# EAGLE board VST2560Board (EAGLE 8.5.2)
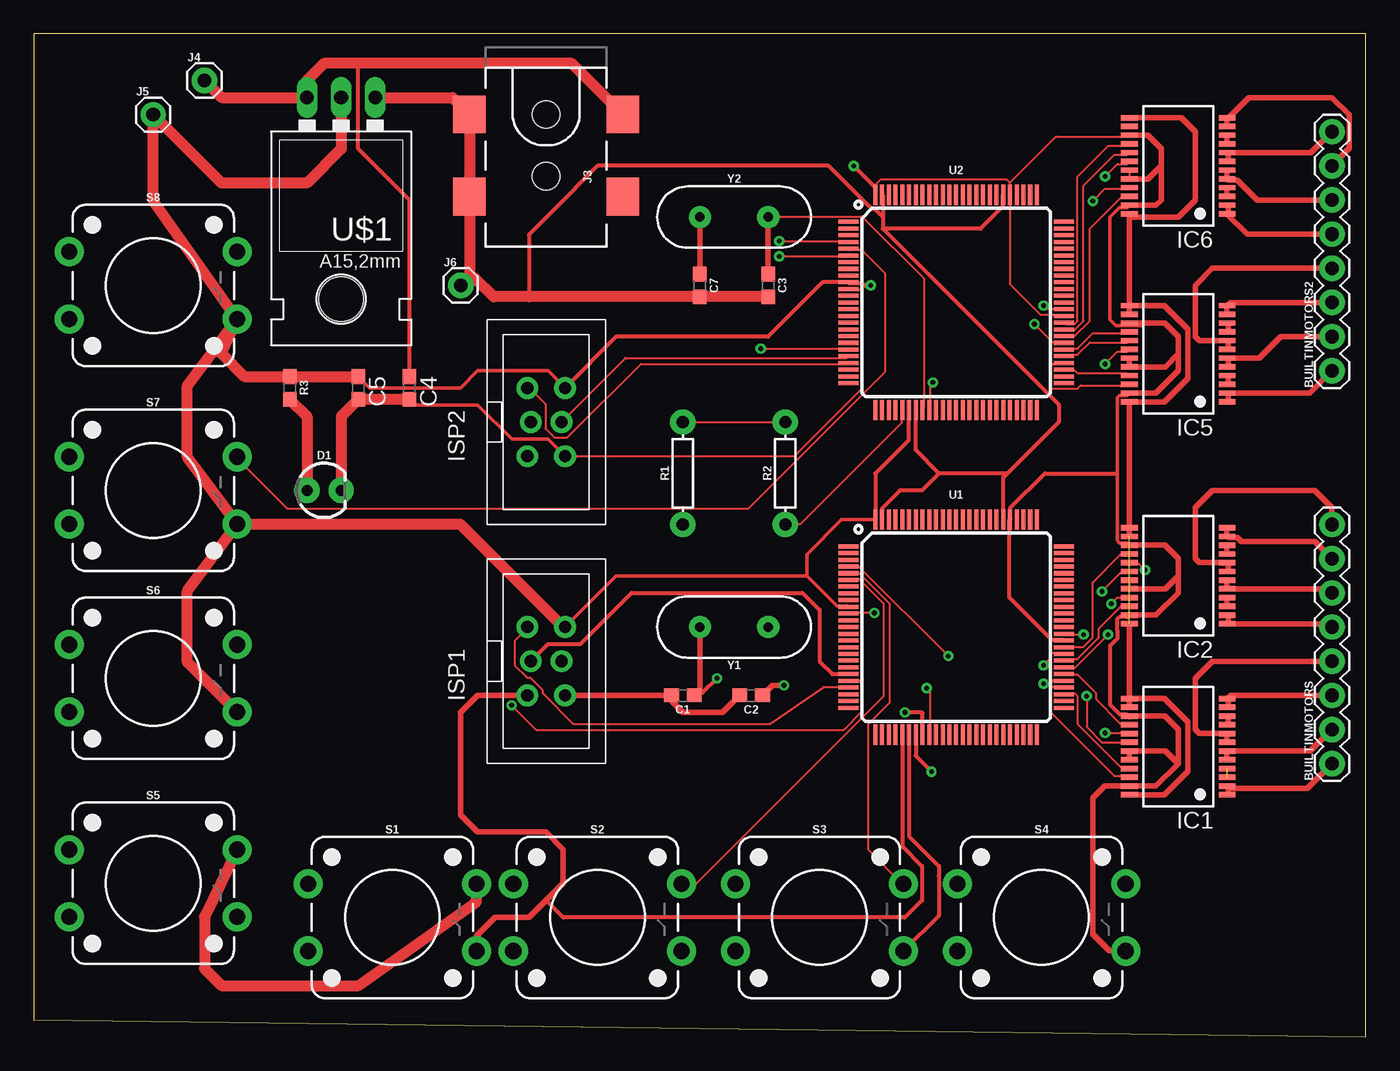
[diagram p0: board, top side]
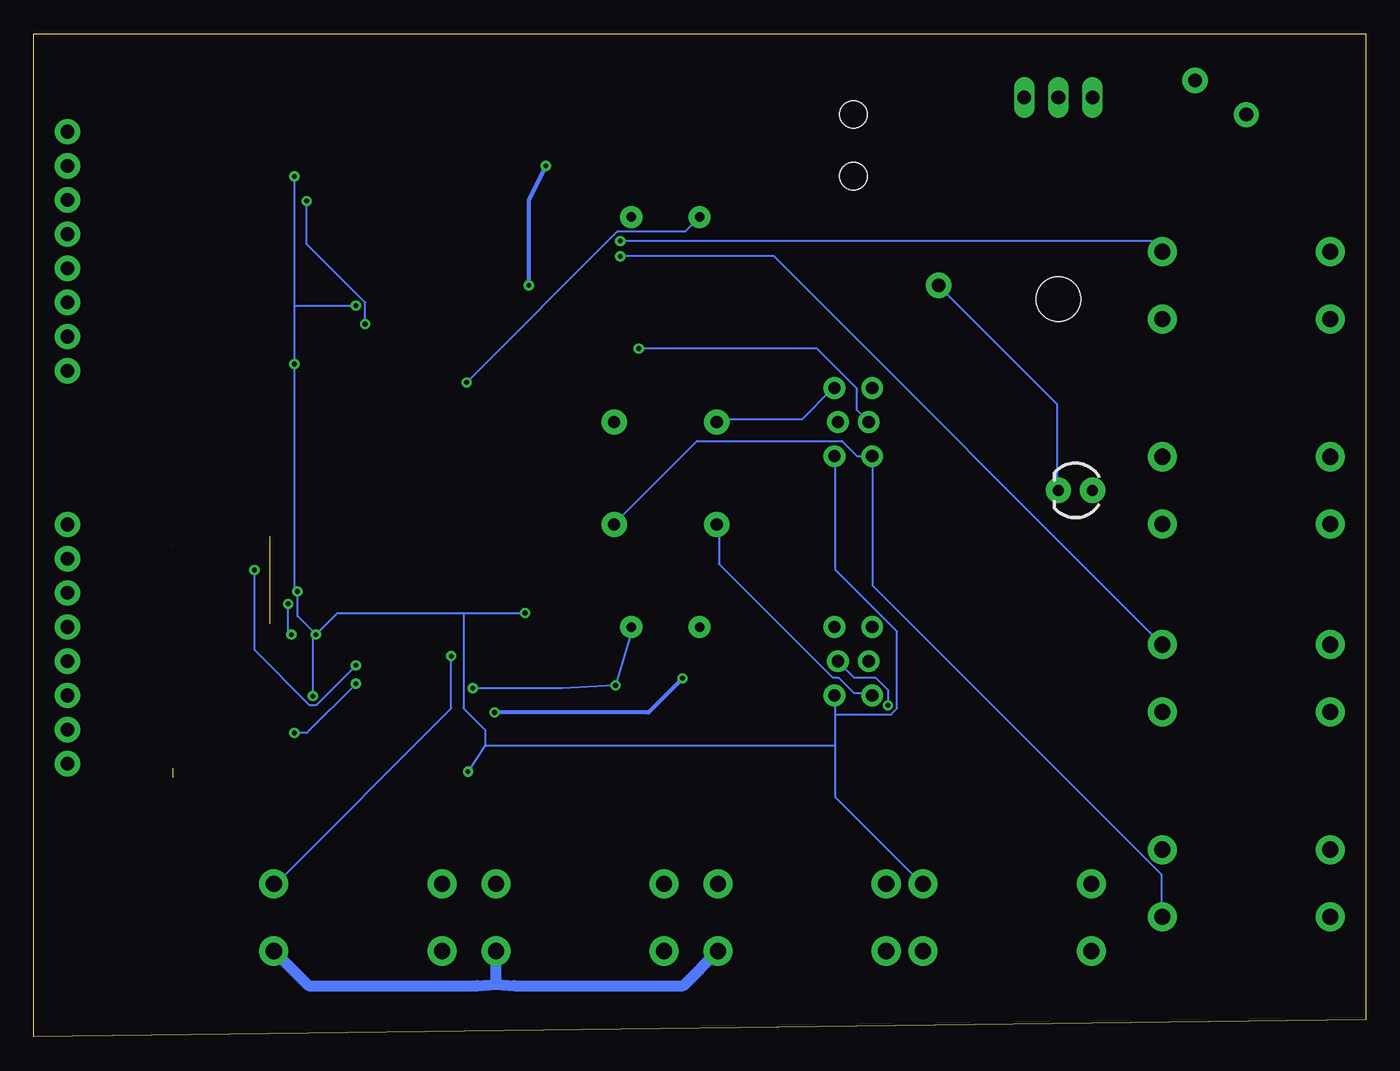
[diagram p1: board, bottom side, seen from below]

Size 99.04 x 74.6 mm. Coordinates in mm from the lower left corner, seen from the top.
Outline: 0,1.27 99.04,0 99.04,74.6 0,74.6 0,1.27
Copper layers (1*16): Top 0.035mm / dielectric 1.5mm / Bottom 0.035mm
Design rules "default": minimum track width 6mil, minimum drill 0.35mm, track to track 6mil, track to pad 6mil, pad to pad 6mil, via to via 6mil, smd to smd 6mil, copper to edge 40mil, drill to drill 6mil, minimum pad ring 10mil, minimum via ring 8mil, stop-mask expansion 4mil, vias tented up to drill 0mil, thermal gap 10mil

## Footprints (pad centres in the part's own frame; a part is rotated, then mirrored left to right if it is on the bottom)
1X08 = drill 1.016 pad 1.88: 1 0,0; 2 2.54,0; 3 5.08,0; 4 7.62,0; 5 10.16,0; 6 12.7,0; 7 15.24,0; 8 17.78,0
0603 = smd 1.1 x 1: 1 -0.85,0; 2 0.85,0
C0603 = smd 1.1 x 1: 1 -0.85,0; 2 0.85,0
LED_3MM = drill 0.813 pad 1.88: A -1.27,0; K 1.27,0
SSOP24 = smd 0.4 x 1.25: 1 -3.575,-3.625; 2 -2.925,-3.625; 3 -2.275,-3.625; 4 -1.625,-3.625; 5 -0.975,-3.625; 6 -0.325,-3.625; 7 0.325,-3.625; 8 0.975,-3.625; 9 1.625,-3.625; 10 2.275,-3.625; 11 2.925,-3.625; 12 3.575,-3.625; 13 3.575,3.625; 14 2.925,3.625; 15 2.275,3.625; 16 1.625,3.625; 17 0.975,3.625; 18 0.325,3.625; 19 -0.325,3.625; 20 -0.975,3.625; 21 -1.625,3.625; 22 -2.275,3.625; 23 -2.925,3.625; 24 -3.575,3.625
AVRISP-BOX = drill 0.9 pad 1.626: 1 -1.397,2.54; 2 1.397,2.54; 3 -1.143,0; 4 1.143,0; 5 -1.397,-2.54; 6 1.397,-2.54
POWER_JACK_SMD = smd 2.8 x 2.4: GND 0,-5.7; P$4 6.1,-5.7; VIN0 0,5.7; VIN1 6.1,5.7 | hole 2.032: 0,0; 4.572,0
1X01 = drill 1.016 pad 1.88: 1 0,0
AXIAL-0.3 = drill 0.9 pad 1.88: P$1 -3.81,0; P$2 3.81,0
TACTILE_SWITCH_PTH_12MM = drill 1.2 pad 2.159: 1 6.25,-2.5; 2 -6.25,-2.5; 3 6.25,2.5; 4 -6.25,2.5
TQFP100 = smd 1.5 x 0.3: 1 -8,6; 2 -8,5.5; 3 -8,5; 4 -8,4.5; 5 -8,4; 6 -8,3.5; 7 -8,3; 8 -8,2.5; 9 -8,2; 10 -8,1.5; 11 -8,1; 12 -8,0.5; 13 -8,0; 14 -8,-0.5; 15 -8,-1; 16 -8,-1.5; 17 -8,-2; 18 -8,-2.5; 19 -8,-3; 20 -8,-3.5; 21 -8,-4; 22 -8,-4.5; 23 -8,-5; 24 -8,-5.5; 25 -8,-6; 51 8,-6; 52 8,-5.5; 53 8,-5; 54 8,-4.5; 55 8,-4; 56 8,-3.5; 57 8,-3; 58 8,-2.5; 59 8,-2; 60 8,-1.5; 61 8,-1; 62 8,-0.5; 63 8,0; 64 8,0.5; 65 8,1; 66 8,1.5; 67 8,2; 68 8,2.5; 69 8,3; 70 8,3.5; 71 8,4; 72 8,4.5; 73 8,5; 74 8,5.5; 75 8,6 | smd 0.3 x 1.5: 26 -6,-8; 27 -5.5,-8; 28 -5,-8; 29 -4.5,-8; 30 -4,-8; 31 -3.5,-8; 32 -3,-8; 33 -2.5,-8; 34 -2,-8; 35 -1.5,-8; 36 -1,-8; 37 -0.5,-8; 38 0,-8; 39 0.5,-8; 40 1,-8; 41 1.5,-8; 42 2,-8; 43 2.5,-8; 44 3,-8; 45 3.5,-8; 46 4,-8; 47 4.5,-8; 48 5,-8; 49 5.5,-8; 50 6,-8; 76 6,8; 77 5.5,8; 78 5,8; 79 4.5,8; 80 4,8; 81 3.5,8; 82 3,8; 83 2.5,8; 84 2,8; 85 1.5,8; 86 1,8; 87 0.5,8; 88 0,8; 89 -0.5,8; 90 -1,8; 91 -1.5,8; 92 -2,8; 93 -2.5,8; 94 -3,8; 95 -3.5,8; 96 -4,8; 97 -4.5,8; 98 -5,8; 99 -5.5,8; 100 -6,8
78XXL = drill 1.016 long: GND 0,-3.81; IN -2.54,-3.81; OUT 2.54,-3.81 | hole 3.302: 0,11.176
HC49US = drill 0.7 pad 1.651: 1 -2.54,0; 2 2.54,0

## Placement (x,y rotation side)
BUILTINMOTORS  [1X08]  96.52,20.32 90 top
BUILTINMOTORS2  [1X08]  96.52,49.53 90 top
C1  22pF  [0603]  48.26,25.4 180 top
C2  22pF  [0603]  53.34,25.4 180 top
C3  22pF  [0603]  54.61,55.88 270 top
C4  [C0603]  27.94,48.26 270 top
C5  [C0603]  24.13,48.26 270 top
C7  22pF  [0603]  49.53,55.88 270 top
D1  [LED_3MM]  21.59,40.64 0 top
IC1  TB6612FNG  [SSOP24]  85.09,21.59 90 top
IC2  TB6612FNG  [SSOP24]  85.09,34.29 90 top
IC5  TB6612FNG  [SSOP24]  85.09,50.8 90 top
IC6  TB6612FNG  [SSOP24]  85.09,64.77 90 top
ISP1  AVRISP-BOX  [AVRISP-BOX]  38.1,27.94 0 top
ISP2  AVRISP-BOX  [AVRISP-BOX]  38.1,45.72 0 top
J3  5.5x2.1mm Barrel  [POWER_JACK_SMD]  38.1,68.58 270 top
J4  [1X01]  12.7,71.12 0 top
J5  [1X01]  8.89,68.58 0 top
J6  [1X01]  31.75,55.88 0 top
R1  10k  [AXIAL-0.3]  48.26,41.91 90 top
R2  10k  [AXIAL-0.3]  55.88,41.91 90 top
R3  1k  [0603]  19.05,48.26 270 top
S1  MOMENTARY-SWITCH-SPST-PTH-12MM  [TACTILE_SWITCH_PTH_12MM]  26.67,8.89 0 top
S2  MOMENTARY-SWITCH-SPST-PTH-12MM  [TACTILE_SWITCH_PTH_12MM]  41.91,8.89 0 top
S3  MOMENTARY-SWITCH-SPST-PTH-12MM  [TACTILE_SWITCH_PTH_12MM]  58.42,8.89 0 top
S4  MOMENTARY-SWITCH-SPST-PTH-12MM  [TACTILE_SWITCH_PTH_12MM]  74.93,8.89 0 top
S5  MOMENTARY-SWITCH-SPST-PTH-12MM  [TACTILE_SWITCH_PTH_12MM]  8.89,11.43 0 top
S6  MOMENTARY-SWITCH-SPST-PTH-12MM  [TACTILE_SWITCH_PTH_12MM]  8.89,26.67 0 top
S7  MOMENTARY-SWITCH-SPST-PTH-12MM  [TACTILE_SWITCH_PTH_12MM]  8.89,40.64 0 top
S8  MOMENTARY-SWITCH-SPST-PTH-12MM  [TACTILE_SWITCH_PTH_12MM]  8.89,55.88 0 top
U1  ATMEGA2560AU  [TQFP100]  68.58,30.48 0 top
U2  ATMEGA2560AU  [TQFP100]  68.58,54.61 0 top
U$1  V_REG_LD1117VXX  [78XXL]  22.86,66.04 180 top
Y1  16MHz  [HC49US]  52.07,30.48 180 top
Y2  16MHz  [HC49US]  52.07,60.96 0 top

## Library data of the parts
BUILTINMOTORS BUILTINMOTORS2 = SparkFun-Connectors; PROD_ID: CONN-08438
C1-C3 C7 = SparkFun-Capacitors; PROD_ID: CAP-07876
C4 C5 IC1 IC2 IC5 IC6 ISP1 ISP2 = adafruit
D1 = SparkFun-LED; PROD_ID: DIO-08794
J3 = SparkFun-Connectors; PROD_ID: CONN-08106; SF_ID: PRT-12748
J4-J6 = SparkFun-Connectors
R1 R2 = SparkFun-Resistors; PROD_ID: RES-12183
R3 = SparkFun-Resistors; PROD_ID: RES-07856
S1-S8 = SparkFun-Switches; PROD_ID: SWCH-09185; SF_SKU: COM-09190
U1 U2 = SparkFun-IC-Microcontroller; PROD_ID: IC-10040
U$1 = SparkFun-IC-Power
Y1 Y2 = SparkFun-Clocks; PROD_ID: XTAL-08181; SF_ID: COM-00536

## Nets
2AIN1: IC2.21 U1.57
2AIN2: IC2.22 U1.58
2AIN12: IC6.21 U2.57
2AIN22: IC6.22 U2.58
2BIN1: IC2.17 U1.59
2BIN2: IC2.16 U1.60
2BIN12: IC6.17 U2.59
2BIN22: IC6.16 U2.60
2PGND1: IC2.3 IC2.4
2PGND2: IC2.9 IC2.10
2PGND12: IC6.3 IC6.4
2PGND22: IC6.9 IC6.10
2TOAO1: BUILTINMOTORS.5 IC2.1 IC2.2
2TOAO2: BUILTINMOTORS.6 IC2.5 IC2.6
2TOAO12: BUILTINMOTORS2.5 IC6.1 IC6.2
2TOAO22: BUILTINMOTORS2.6 IC6.5 IC6.6
2TOBO1: BUILTINMOTORS.7 IC2.11 IC2.12
2TOBO2: BUILTINMOTORS.8 IC2.7 IC2.8
2TOBO12: BUILTINMOTORS2.7 IC6.11 IC6.12
2TOBO22: BUILTINMOTORS2.8 IC6.7 IC6.8
5V: C5.1 IC1.15 IC1.19 IC1.20 IC1.23 IC2.15 IC2.19 IC2.20 IC2.23 IC5.15 IC5.19 IC5.20 IC5.23 IC6.15 IC6.19 IC6.20 IC6.23 ISP1.2 ISP2.2 J5.1 R1.P$2 R2.P$2 R3.1 S2.1 S3.1 S4.1 S6.1 S7.1 S8.1 U1.10 U1.31 U1.61 U1.80 U1.100 U2.10 U2.31 U2.61 U2.80 U2.100 U$1.GND
12V: IC1.13 IC1.14 IC1.24 IC2.13 IC2.14 IC2.24 IC5.13 IC5.14 IC5.24 IC6.13 IC6.24
AIN1: IC1.21 U1.53
AIN2: IC1.22 U1.54
AIN12: IC5.21 U2.53
AIN22: IC5.22 U2.54
BIN1: IC1.17 U1.55
BIN2: IC1.16 U1.56
BIN12: IC5.17 U2.55
BIN22: IC5.16 U2.56
DOWN: S2.3 U1.6
DOWN2: S6.3 U2.6
GND: C1.2 C2.2 C3.2 C4.2 C5.2 C7.2 D1.K IC1.18 IC2.18 IC5.18 IC6.18 ISP1.6 ISP2.6 J3.GND J3.P$4 J6.1 S1.3 S5.3 U1.11 U1.32 U1.62 U1.81 U1.99 U2.11 U2.32 U2.62 U2.81 U2.99 U$1.IN
MISO: ISP1.1 U1.22
MISO2: ISP2.1 U2.22
MOSI: ISP1.4 U1.21
MOSI2: ISP2.4 U2.21
MOTORUP: S3.3 U1.5
MOTORUP2: S7.3 U2.5
N$1: D1.A R3.2
N$2: C2.1 U1.34 Y1.1
N$5: C1.1 U1.33 Y1.2
N$13: IC6.14
N$70: C3.1 U2.33 Y2.2
N$71: C7.1 U2.34 Y2.1
N$123: U2.19
PGND1: IC1.3 IC1.4
PGND2: IC1.9 IC1.10
PGND12: IC5.3 IC5.4
PGND22: IC5.9 IC5.10
RANDOM: S4.3 U1.4
RANDOM2: S8.3 U2.4
RESETCIRCUIT: ISP1.5 R1.P$1 S1.1 U1.30
RESETCIRCUIT2: ISP2.5 R2.P$1 S5.1 U2.30
SCK: ISP1.3 U1.20
SCK2: ISP2.3 U2.20
TCK: U1.93
TCK2: U2.93
TDI: U1.90
TDI2: U2.90
TMS: U1.92
TMS2: U2.92
TOAO1: BUILTINMOTORS.1 IC1.1 IC1.2
TOAO2: BUILTINMOTORS.2 IC1.5 IC1.6
TOAO12: BUILTINMOTORS2.1 IC5.1 IC5.2
TOAO22: BUILTINMOTORS2.2 IC5.5 IC5.6
TOBO1: BUILTINMOTORS.3 IC1.11 IC1.12
TOBO2: BUILTINMOTORS.4 IC1.7 IC1.8
TOBO12: BUILTINMOTORS2.3 IC5.11 IC5.12
TOBO22: BUILTINMOTORS2.4 IC5.7 IC5.8
VIN: C4.1 J3.VIN0 J4.1 U$1.OUT

## Tracks (layer width: path | path; a pad name or v marks a point on that pad's centre or on a via)
2AIN1  (via drill 0.35)
  Top 0.152: v80.11,32.21 80.57,32.66 81.26,32.66 IC2.21 | v79.88,29.92 77.37,27.41 76.68,27.41 U1.57
  Bottom 0.152: v80.11,32.21 80.11,30.15 v79.88,29.92
2AIN2
  Top 0.152: IC2.22 81.26,31.98 80.8,31.98 79.2,30.38 79.2,29.69 77.6,28.09 76.68,28.09 U1.58
2AIN12  (via drill 0.35)
  Top 0.152: v78.74,62.15 79.65,63.07 81.26,63.07 IC6.21 | v74.4,53.01 75.77,51.64 76.45,51.64 U2.57
  Bottom 0.152: v78.74,62.15 78.74,58.95 74.4,54.61 v74.4,53.01
2AIN22
  Top 0.152: IC6.22 81.26,62.38 80.8,62.38 78.51,60.1 78.51,53.24 77.37,52.1 76.68,52.1 U2.58
2BIN1  (via drill 0.35)
  Top 0.152: v82.63,34.72 82.17,35.18 81.48,35.18 IC2.17 | v75.08,27.63 75.54,28.09 75.54,28.32 75.77,28.55 76.45,28.55 U1.59
  Bottom 0.152: v82.63,34.72 82.63,28.78 78.51,24.66 78.05,24.66 v75.08,27.63
2BIN2
  Top 0.152: IC2.16 81.26,35.87 80.8,35.87 78.74,33.81 78.74,29.69 78.05,29.01 76.68,29.01 U1.60
2BIN12
  Top 0.152: IC6.17 81.26,65.58 80.34,65.58 78.05,63.3 78.05,53.24 77.37,52.55 76.68,52.55 U2.59
2BIN22
  Top 0.152: IC6.16 81.26,66.27 79.88,66.27 77.6,63.98 77.6,53.24 77.37,53.01 76.68,53.01 U2.60
2PGND1
  Top 0.406: IC2.3 IC2.4
2PGND2  (1 unrouted)
  Top 0.406: IC2.9 IC2.10
2PGND12
  Top 0.152: 88.8,62.61 IC6.3 | 88.8,63.07 IC6.4
  Top 0.406: IC6.3 IC6.4
2PGND22
  Top 0.152: 88.8,66.5 IC6.9 | 88.8,66.95 IC6.10
  Top 0.406: IC6.9 IC6.10
2TOAO1
  Top 0.152: 88.8,30.84 IC2.1 88.8,30.61 | 88.8,31.29 IC2.2 | 96.34,30.61 BUILTINMOTORS.5
  Top 0.406: BUILTINMOTORS.5 96.29,30.72 IC2.1 88.8,30.8 88.8,31.29
2TOAO2
  Top 0.152: 88.8,33.35 IC2.5 | 88.8,33.81 IC2.6
  Top 0.406: IC2.6 IC2.5 96.23,33.32 BUILTINMOTORS.6
2TOAO12
  Top 0.152: 88.8,61.24 IC6.1 | 88.8,61.7 IC6.2
  Top 0.406: BUILTINMOTORS2.5 90.22,59.69 IC6.1 88.8,61.28 88.8,61.7
2TOAO22
  Top 0.152: 88.8,63.75 IC6.5 | 96.34,62.38 BUILTINMOTORS2.6
  Top 0.406: IC6.6 IC6.5 88.81,63.7 89.48,63.7 90.96,62.23 BUILTINMOTORS2.6
2TOBO1
  Top 0.152: 88.8,37.69 IC2.12
  Top 0.406: IC2.12 IC2.11 88.81,37.12 89.49,37.12 89.78,36.83 95.25,36.83 BUILTINMOTORS.7
2TOBO2
  Top 0.152: 88.8,34.72 IC2.7 | 88.8,35.18 IC2.8
  Top 0.406: IC2.7 88.8,34.7 88.8,35.18 | IC2.8 86.65,35.27 86.36,35.56 86.36,39.37 87.63,40.64 95.25,40.64 96.52,39.37 BUILTINMOTORS.8
2TOBO12
  Top 0.152: 88.8,67.87 IC6.11 | 88.8,68.33 IC6.12 | 96.57,64.9 BUILTINMOTORS2.7
  Top 0.406: IC6.11 88.71,68.24 88.8,68.33 90.32,69.85 96.52,69.85 97.79,68.58 97.79,67.87 97.82,67.85 97.82,66.06 BUILTINMOTORS2.7
2TOBO22
  Top 0.152: 88.8,65.13 IC6.7 | 88.8,65.58 IC6.8
  Top 0.406: IC6.7 88.8,65.18 88.8,65.58 | IC6.8 94.95,65.75 BUILTINMOTORS2.8
5V  (via drill 0.35)
  Top 0.152: R1.P$2 48.34,45.7 55.88,45.7 R2.P$2 | 60.45,56.21 U2.10 | 24.33,48.9 C5.1 | IC6.19 81.48,64.44 81.48,63.98 IC6.20 | 72.57,63.52 72.34,63.75 62.97,63.75 62.51,63.3 62.51,62.61 U2.100 | 72.57,63.52 72.57,62.61 U2.80 72.57,62.38 72.57,55.98 74.85,53.7 76.45,53.7 U2.61 | 72.57,63.52 76,66.95 81.26,66.95 IC6.15 | 82.17,23.75 81.48,23.75 IC1.15 | IC2.19 81.48,33.81 81.48,33.35 IC2.20 | 60.45,31.98 U1.10 | 65.02,46.61 U2.31 | 62.51,38.61 U1.100 | 39.65,30.61 ISP1.2 39.42,30.61 | 81.03,6.6 S4.1 | 15.42,37.92 S7.1
  Top 0.254: ISP1.2 43.31,34.29 57.47,34.29 | U1.10 60.51,32.05 59.71,32.05 57.47,34.29 | U1.100 60.07,38.48 57.47,35.88 57.47,34.29 | IC6.23 81.3,61.68 80.73,61.68 80.01,60.96 80.01,53.34 80.45,52.9 82.38,52.9 82.55,53.07 | IC2.15 81.29,36.74 80.72,36.74 80.56,36.9 80.56,41.91 80.56,47.54 80.73,47.71 81.3,47.71 IC5.23 | C5.1 24.98,48.26 31.75,48.26 33.02,49.53 38.23,49.53 ISP2.2
  Top 0.305: U2.31 65.03,46.57 65.03,44.35 62.58,41.9 U1.100 | 80.56,41.91 75.18,41.91 72.62,39.36 72.62,38.52 U1.80 72.54,38.44 72.54,38.29 72.54,32.69 75.7,29.52 76.54,29.52 U1.61 | IC2.23 81.32,31.22 80.71,31.22 80.54,31.04 80.54,30.23 80.57,30.2 80.57,29.64 80.01,29.08 80.01,24.71 80.71,24.01 81.22,24.01 81.48,23.75 | v62.23,55.88 61.78,55.88 61.59,56.07 60.62,56.07 U2.10 58.65,56.11 54.61,52.07 43.31,52.07 ISP2.2 | v60.96,64.77 62.58,63.15 U2.100 | U1.31 65.08,14.93 67.31,12.7 67.31,11.98 67.3,11.96 67.3,9.02 S3.1
  Top 0.406: S4.1 79.97,6.39 78.74,7.62 78.74,17.78 79.62,18.66 IC1.23 83.43,18.66 85.09,20.32 | IC6.15 82.82,67.04 83.82,66.04 83.82,64.77 | IC6.23 83.43,61.85 83.82,62.23 83.82,64.77 | IC6.20 82.84,63.79 83.82,64.77 | IC5.23 83.43,47.88 85.09,49.53 85.09,50.8 | IC5.15 82.55,53.07 84.08,53.07 85.09,52.07 85.09,50.8 | IC5.19 IC5.20 84.11,49.82 85.09,50.8 | IC2.23 83.43,31.37 85.09,33.02 85.09,34.29 | 85.09,34.29 85.09,35.56 84.08,36.57 IC2.15 | IC2.20 84.11,33.32 85.09,34.29 | IC1.15 84.08,23.87 85.09,22.86 85.09,20.32 | IC1.20 IC1.19 84.14,21.27 85.09,20.32
  Top 0.813: S8.1 8.89,62.17 J5.1 13.97,63.5 20.32,63.5 22.86,66.04 U$1.GND | S6.1 11.43,27.88 11.43,33.16 S7.1 | S7.1 11.43,43.12 11.43,48.4 S8.1 | S8.1 13.93,50.84 15.66,49.11 R3.1 C5.1 | S7.1 31.71,38.14 39.37,30.48 ISP1.2
  Bottom 0.152: R1.P$2 48.11,45.92 41.94,45.92 39.65,48.21 ISP2.2
  Bottom 0.305: v60.96,64.77 62.23,62.23 v62.23,55.88
  Bottom 0.813: S4.1 78.6,3.81 66.04,3.81 64.67,3.91 | 64.67,3.91 S3.1 | 64.67,3.91 63.3,3.81 50.74,3.81 S2.1
12V  (1 unrouted)
  Top 0.406: IC6.13 85.33,68.34 86.36,67.31 86.36,62.23 85.09,60.96 81.7,60.96 IC6.24 IC5.13 | IC5.13 84.05,54.38 85.8,52.63 85.8,48.97 84.05,47.23 IC5.24 IC2.13 IC2.14 | IC5.14 IC5.13 | IC2.24 IC1.13 | IC1.14 IC1.13 | IC1.13 84.05,25.16 85.8,23.42 85.8,19.76 84.05,18.02 IC1.24
AIN1
  Top 0.152: IC1.21 81.26,20.09 80.8,20.09 77.6,23.29 77.6,25.35 77.37,25.58 76.68,25.58 U1.53
AIN2
  Top 0.152: IC1.22 81.26,19.41 80.34,19.41 75.54,24.21 75.54,25.81 75.77,26.04 76.45,26.04 U1.54
AIN12
  Top 0.152: IC5.21 81.26,49.35 77.6,49.35 77.37,49.58 76.68,49.58 U2.53
AIN22
  Top 0.152: IC5.22 81.26,48.44 77.83,48.44 77.6,48.21 75.54,48.21 75.54,49.81 75.77,50.04 76.45,50.04 U2.54
BIN1  (via drill 0.35)
  Top 0.152: v79.65,22.61 81.26,22.61 IC1.17 | v75.08,26.26 75.54,26.26 75.77,26.49 76.45,26.49 U1.55
  Bottom 0.152: v79.65,22.61 78.74,22.61 v75.08,26.26
BIN2
  Top 0.152: IC1.16 81.26,23.29 80.8,23.29 78.97,25.12 78.97,25.58 77.6,26.95 76.68,26.95 U1.56
BIN12
  Top 0.152: IC5.17 81.26,51.64 78.51,51.64 77.6,50.72 76.68,50.72 U2.55
BIN22
  Top 0.152: IC5.16 81.26,52.32 78.74,52.32 77.6,51.18 76.68,51.18 U2.56
DOWN
  Top 0.152: U1.6 60.68,34.04 61.37,34.04 63.19,32.21 63.19,25.35 49.25,11.41 48.34,11.41 S2.3
DOWN2  (via drill 0.35)
  Top 0.152: v55.42,58.04 60.45,58.04 U2.6
  Bottom 0.152: v55.42,58.04 43.99,58.04 15.19,29.23 S6.3
GND  (via drill 0.35)
  Top 0.152: U2.11 60.68,55.52 61.59,55.52 61.59,48.21 56.57,43.18 ISP2.6 39.42,43.18 | 28.22,47.29 C4.2 | 63.19,38.61 U1.99 | 65.48,46.61 U2.32 | 49.71,55.07 C7.2 49.48,55.07 | C3.2 54.51,55.07 | 32.79,56.44 32.4,56.53 | v78.28,25.35 78.28,23.06 79.43,21.92 81.26,21.92 IC1.18 | v78.05,29.92 76.68,29.92 U1.62 | v79.43,33.12 80.8,34.49 81.26,34.49 IC2.18 | v79.65,50.04 80.57,50.95 81.26,50.95 IC5.18 | v79.65,63.98 80.57,64.9 81.26,64.9 IC6.18 | v62.51,31.52 60.68,31.52 U1.11 | 65.48,22.38 U1.32 | v75.08,54.38 75.31,54.15 76.45,54.15 U2.62
  Top 0.254: C4.2 28.36,46.99 33.02,46.99 35.56,44.45 38.23,44.45 ISP2.6
  Top 0.305: U2.99 63.12,62.57 63.12,60.96 | 63.12,60.96 63.12,60.09 | 63.12,60.09 76.2,47.01 76.2,45.72 72.39,41.91 | 72.39,41.91 67.31,41.91 | U2.32 65.58,43.64 67.31,41.91 | 67.31,41.91 66.04,40.64 64.41,40.64 63.08,39.31 U1.99 | U1.81 72.08,41.6 72.39,41.91 | 63.12,60.96 62.53,61.55 62.3,61.55 59.09,64.77 41.91,64.77 40.28,63.14 40.28,63.1 36.83,59.65 36.83,55.03 | U2.81 72.04,62.57 72.04,61.73 70.39,60.09 63.12,60.09 | U1.32 65.58,20.91 v66.75,19.74
  Top 0.406: ISP1.6 C1.2 47.41,24.98 48.26,24.13 51.22,24.13 C2.2
  Top 0.813: J6.1 32.4,56.53 J3.P$4 J3.GND 31.13,69.85 U$1.IN | D1.K 22.86,46.14 C5.2 C4.2 | S5.3 12.7,8.95 12.7,5.08 13.97,3.81 24.13,3.81 32.92,10.06 S1.3 | 32.79,56.44 34.2,55.03 36.83,55.03 C7.2 54.47,55.03 54.51,55.07
  Bottom 0.152: D1.K 22.96,40.66 22.96,47.07 31.65,55.75 J6.1 | 39.42,21.69 39.42,17.8 33.02,11.41 S1.3 | 39.42,21.69 39.42,23.98 | 39.42,23.98 39.42,25.35 ISP1.6 | v78.28,25.35 78.28,29.69 v78.05,29.92 | v78.05,29.92 79.43,31.29 v79.43,33.12 79.65,33.35 v79.65,50.04 79.65,54.38 | 79.65,54.38 v79.65,63.98 | 67.08,31.52 76.45,31.52 v78.05,29.92 | 67.08,31.52 v62.51,31.52 | 65.48,21.69 65.48,22.84 67.08,24.44 67.08,31.52 | 65.48,21.69 v66.75,19.74 | 79.65,54.38 v75.08,54.38 | 65.48,21.69 39.42,21.69 | 39.42,23.98 35.31,23.98 34.85,24.44 34.85,30.15 39.42,34.72 39.42,43.18 ISP2.6
MISO
  Top 0.152: U1.22 60.45,26.04 58.75,26.04 54.74,23.29 40.11,23.29 37.82,25.58 37.82,25.81 36.91,26.72 36.68,26.72 35.76,27.63 35.76,29.46 36.68,30.38 ISP1.1
MISO2
  Top 0.152: U2.22 60.45,50.04 45.14,50.04 39.65,44.55 38.73,44.55 38.05,45.24 38.05,47.07 36.91,48.21 ISP2.1
MOSI  (via drill 0.35)
  Top 0.152: v35.53,24.66 37.36,22.84 60.22,22.84 61.59,24.21 61.59,26.26 61.37,26.49 60.68,26.49 U1.21
  Bottom 0.152: v35.53,24.66 35.53,25.81 36.45,26.72 38.05,26.72 39.19,27.86 ISP1.4
MOSI2
  Top 0.152: U2.21 60.45,50.49 43.99,50.49 39.42,45.92 ISP2.4
MOTORUP
  Top 0.152: U1.5 60.68,34.49 61.37,34.49 63.65,32.21 63.65,24.89 62.05,23.29 62.05,13.92 64.57,11.41 S3.3
MOTORUP2
  Top 0.152: U2.5 60.68,58.5 61.59,58.5 63.32,56.77 63.32,49.48 53.14,39.29 18.85,39.29 15.19,42.95 S7.3
N$1
  Top 0.813: R3.2 20.32,46.14 D1.A
N$2  (via drill 0.35)
  Top 0.152: v66.4,25.93 66.62,25.7 66.62,22.61 U1.34
  Top 0.406: v55.78,26.14 54.93,26.14 C2.1
  Bottom 0.152: Y1.1 54.51,30.38 v55.78,26.14 59.79,25.93 v66.4,25.93
N$5  (via drill 0.35)
  Top 0.305: U1.33 66.08,24.09 66.04,24.13 v64.77,24.13 | v50.8,26.67 49.74,25.61 49.32,25.61
  Top 0.406: Y1.2 49.53,25.82 49.32,25.61 C1.1
  Bottom 0.305: v50.8,26.67 53.34,24.13 v64.77,24.13
N$70
  Top 0.152: 54.74,56.9 C3.1 | 54.74,60.78 Y2.2 54.74,61.01 61.59,61.01 66.17,56.44 66.17,46.84 U2.33
  Top 0.406: C3.1 Y2.2
N$71  (via drill 0.35)
  Top 0.152: 49.71,56.9 C7.1 | 49.71,60.78 Y2.1 | v66.85,48.67 66.62,48.44 66.62,46.84 U2.34
  Top 0.406: Y2.1 49.53,57.07 49.71,56.9
  Bottom 0.152: v66.85,48.67 55.65,59.87 50.62,59.87 Y2.1
PGND1  (1 unrouted)
PGND2
  Top 0.152: 88.8,23.29 IC1.9 | 88.8,23.75 IC1.10
  Top 0.406: IC1.9 88.8,23.3 88.8,23.75
PGND12
  Top 0.152: 88.8,48.67 IC5.3 | 88.8,49.12 IC5.4
  Top 0.406: IC5.3 88.8,48.61 88.8,49.12
PGND22
  Top 0.152: 88.8,52.55 IC5.9 | 88.8,53.01 IC5.10
  Top 0.406: IC5.9 88.8,52.51 88.8,53.01
RANDOM  (via drill 0.35)
  Top 0.152: v68,28.32 61.37,34.95 60.68,34.95 U1.4
  Bottom 0.152: v68,28.32 68,24.44 81.03,11.41 S4.3
RANDOM2  (via drill 0.35)
  Top 0.152: v55.42,59.18 60.45,59.18 U2.4
  Bottom 0.152: v55.42,59.18 15.88,59.18 15.19,58.5 S8.3
RESETCIRCUIT
  Top 0.152: 64.57,22.38 U1.30 | 36.68,25.35 ISP1.5
  Top 0.305: U1.30 64.58,14.16 66.04,12.7 66.04,11.98 66.05,11.96 66.05,10.82 66.04,10.8 66.04,10.16 64.77,8.89 39.37,8.89 38.1,10.16
  Top 0.406: ISP1.5 33.02,25.4 31.75,24.13 31.75,16.51 33.02,15.24 38.1,15.24 39.37,13.97 39.37,11.43 38.1,10.16 36.83,8.89 34.29,8.89 32.92,7.52 S1.1
  Bottom 0.152: ISP1.5 36.91,25.58 38.05,25.58 39.19,26.72 39.65,26.72 48.11,35.18 48.11,37.92 R1.P$1
RESETCIRCUIT2
  Top 0.152: U2.30 64.57,46.61 64.57,45.7 57.02,38.15 55.88,38.15 R2.P$1
  Bottom 0.152: R2.P$1 55.88,38.15 49.71,44.32 38.96,44.32 37.82,43.18 ISP2.5 36.68,43.18 36.68,33.58 15.19,12.09 15.19,9.12 S5.1
SCK
  Top 0.152: 60.45,26.95 U1.20 | 37.14,28.09 ISP1.3
  Top 0.305: ISP1.3 38.23,29.21 40.64,29.21 44.45,33.02 57.15,33.02 58.42,31.75 58.42,27.94 59.38,26.98 U1.20
SCK2  (via drill 0.35)
  Top 0.152: v54.05,51.18 60.45,51.18 U2.20
  Bottom 0.152: v54.05,51.18 40.79,51.18 37.82,48.21 37.82,46.61 37.14,45.92 ISP2.3
TOAO1
  Top 0.152: 88.8,18.03 IC1.1 | 88.8,18.49 IC1.2
  Top 0.406: BUILTINMOTORS.1 94.69,18.49 88.8,18.49 88.8,18.1 IC1.1
TOAO2
  Top 0.152: 88.8,20.78 IC1.5
  Top 0.406: BUILTINMOTORS.2 94.92,21.27 IC1.6 IC1.5
TOAO12
  Top 0.152: 88.8,47.29 IC5.1 | 88.8,47.75 IC5.2 88.8,47.98
  Top 0.406: IC5.2 94.86,47.88 BUILTINMOTORS2.1 | IC5.1 88.8,47.31 88.8,47.75
TOAO22
  Top 0.152: 88.8,49.81 IC5.5 | 88.8,50.49 IC5.6 | 96.34,51.87 BUILTINMOTORS2.2
  Top 0.406: IC5.5 88.8,49.91 88.8,50.49 | IC5.6 91.11,50.48 92.71,52.07 BUILTINMOTORS2.2
TOBO1
  Top 0.152: 88.8,24.66 IC1.11 | 88.8,25.12 IC1.12 | 96.34,25.35 BUILTINMOTORS.3
  Top 0.406: IC1.11 88.8,24.6 88.8,25.12 | IC1.12 88.95,25.4 BUILTINMOTORS.3
TOBO2
  Top 0.152: 88.11,22.61 88.57,22.61 IC1.8 | 96.34,27.86 BUILTINMOTORS.4
  Top 0.406: IC1.7 IC1.8 86.65,22.57 86.36,22.86 86.36,26.67 87.63,27.94 BUILTINMOTORS.4
TOBO12
  Top 0.406: IC5.11 IC5.12 88.95,54.61 BUILTINMOTORS2.3
TOBO22
  Top 0.152: 88.8,51.18 IC5.7 | 88.8,51.64 IC5.8 88.57,51.87
  Top 0.406: 88.8,51.18 88.8,51.69 IC5.8 86.65,51.77 86.36,52.07 86.36,55.88 87.63,57.15 BUILTINMOTORS2.4
VIN
  Top 0.152: 27.76,49.12 C4.1
  Top 0.305: C4.1 27.94,62.23 24.13,66.04 24.13,72.39
  Top 0.813: J3.VIN0 39.99,72.39 24.13,72.39 21.59,72.39 20.32,71.12 U$1.OUT 13.97,69.85 J4.1